# Altium PCB ESP32_CAN_V2.PcbDoc
Units mm, origin at the board's own origin, x right, y up, seen from the top; angles counter-clockwise.
Board outline 80 x 50 mm, 4 copper layers (Top Layer, Layer 1, Layer 2, Bottom Layer), stack 0.603 mm thick; 86 components, 94 nets, 361 pads, 29 vias.
Unrouted connection lines stored in the file: 147.
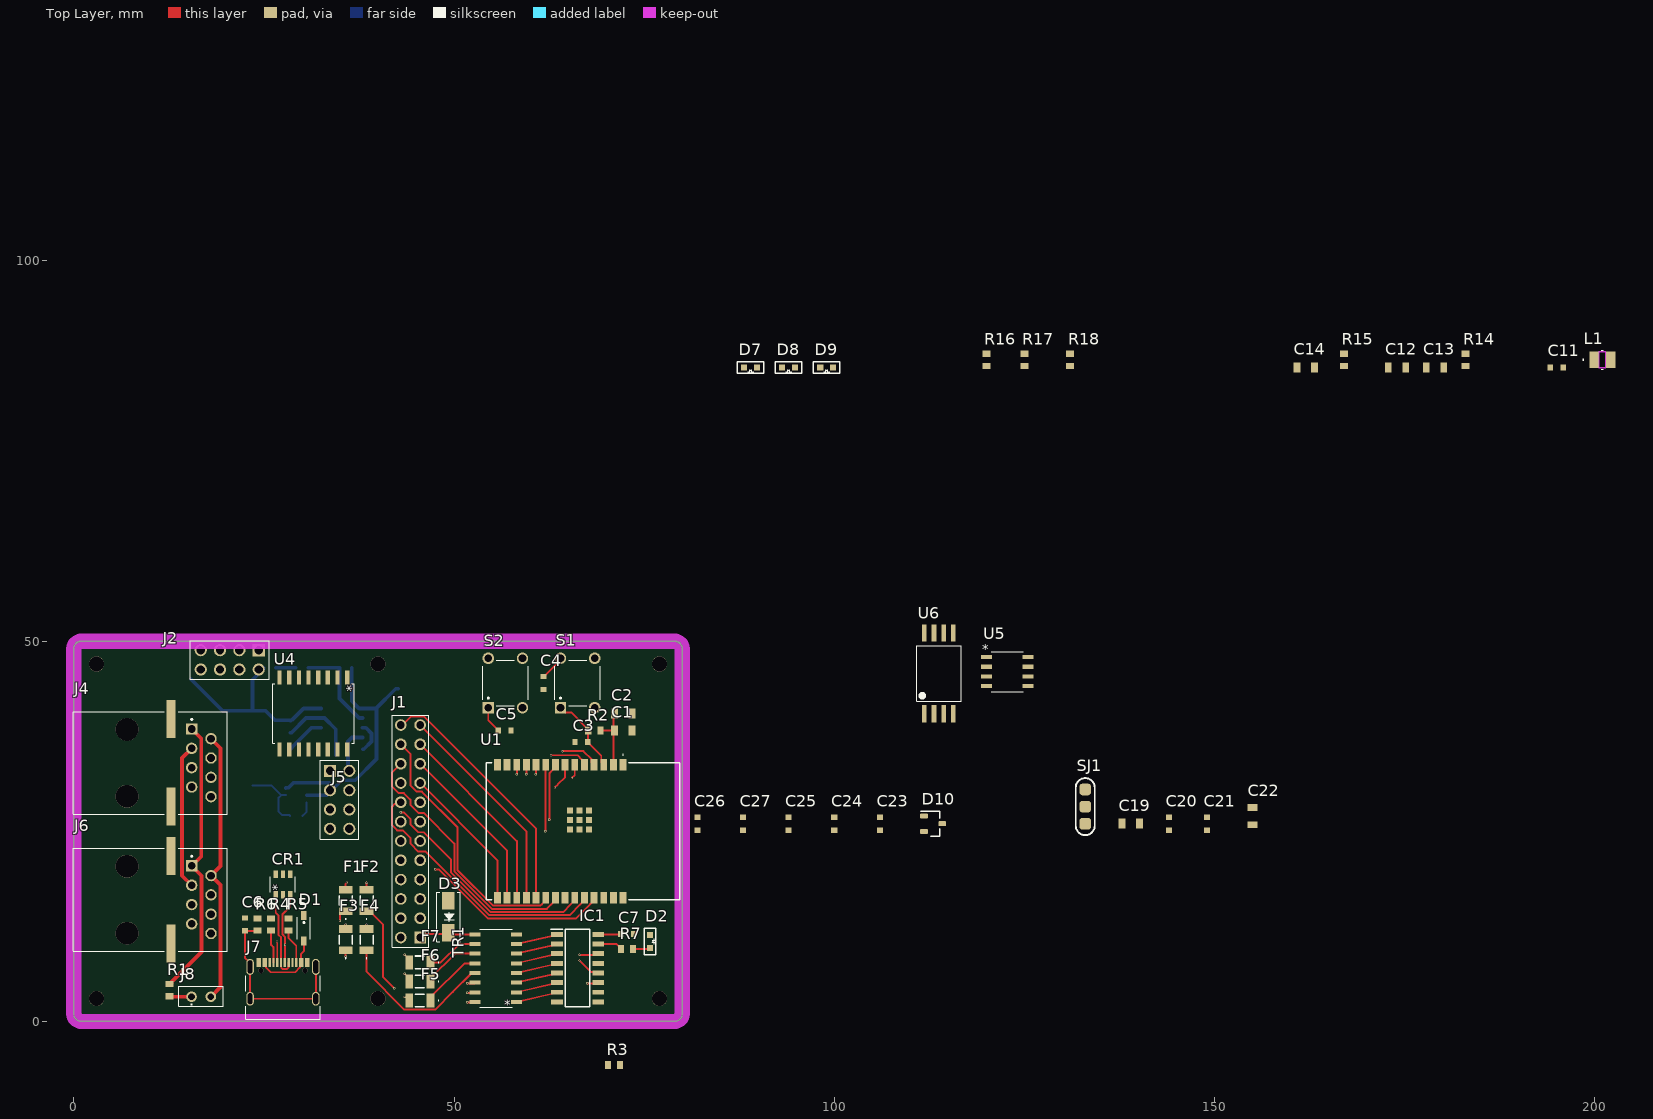
[diagram p0: Top Layer view]
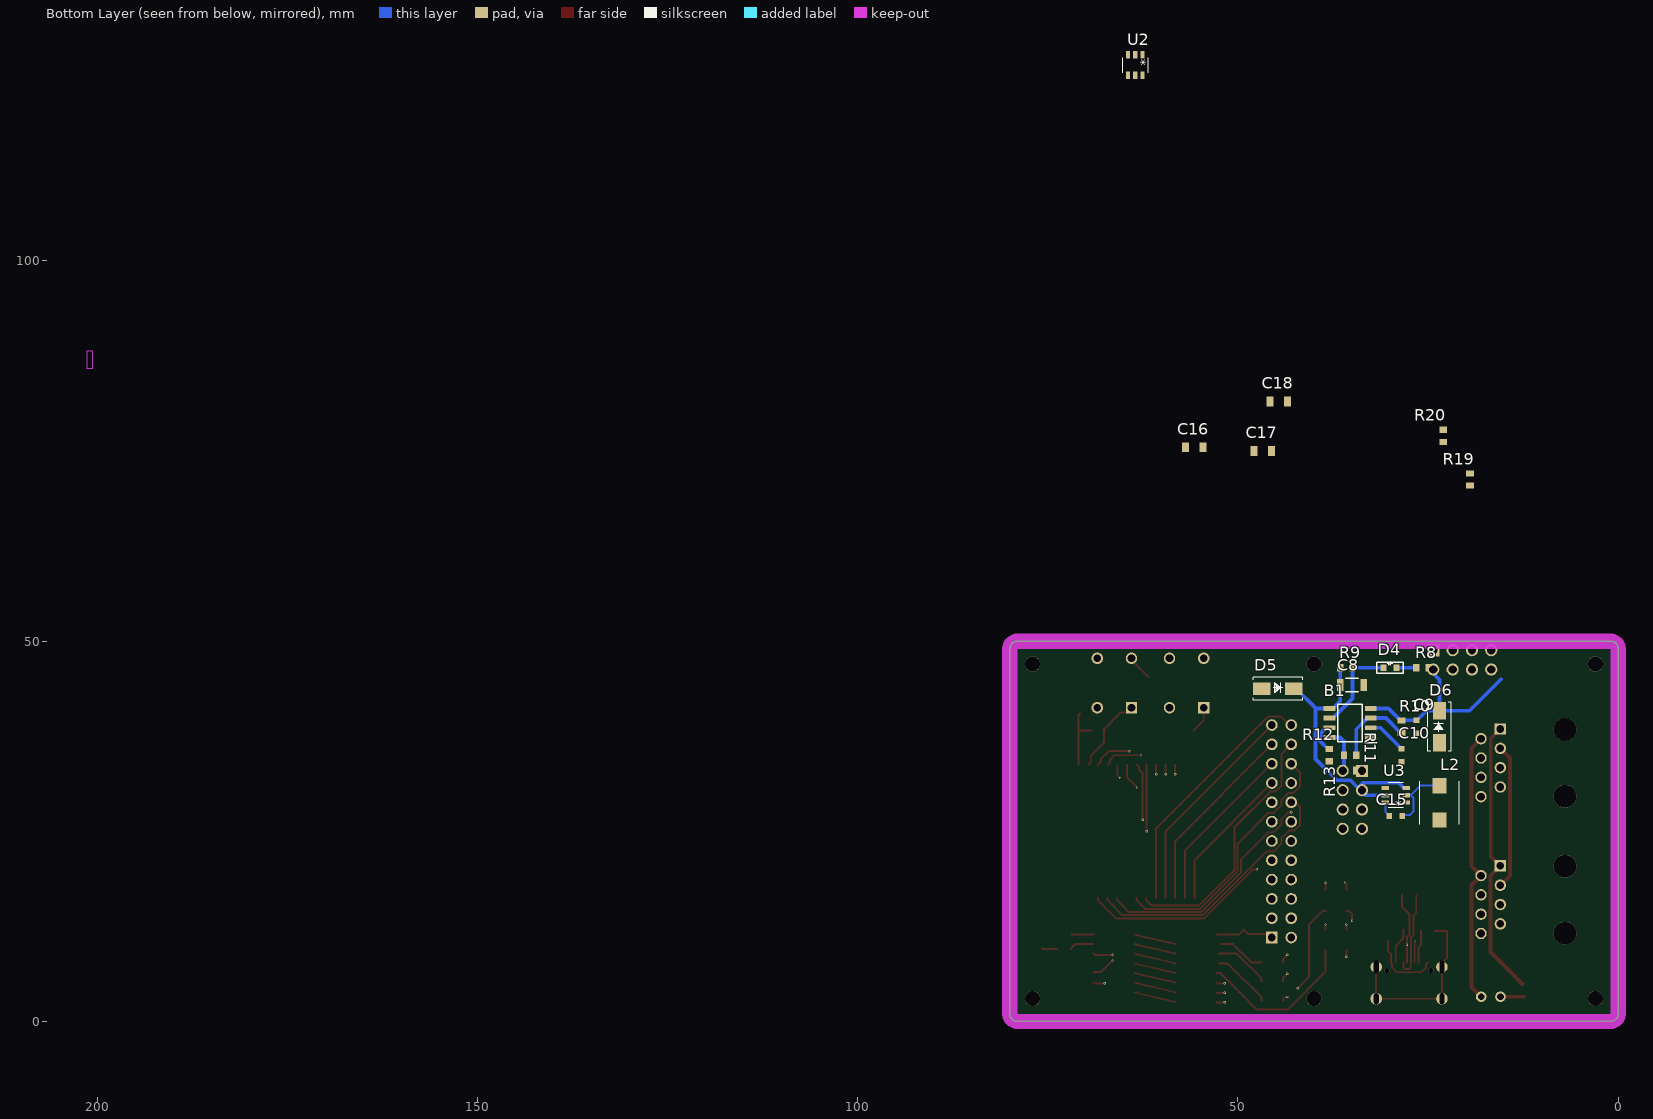
[diagram p1: Bottom Layer view, seen from below]
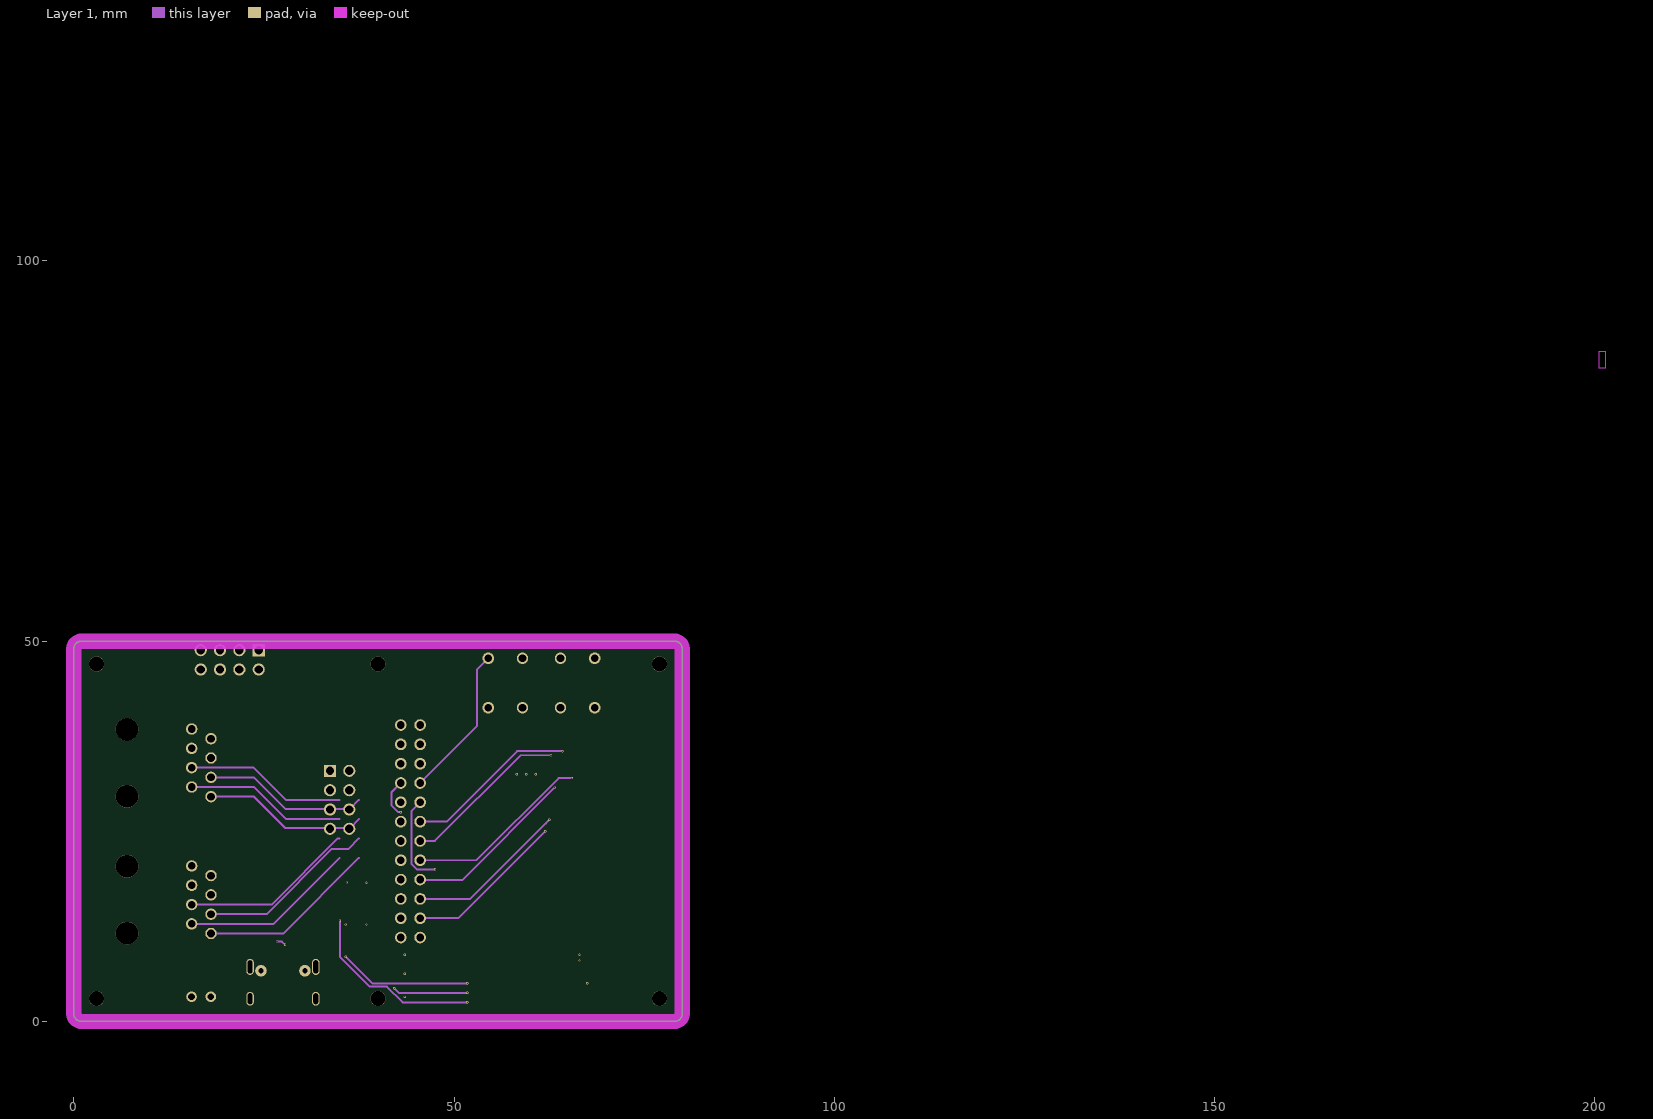
[diagram p2: Layer 1]
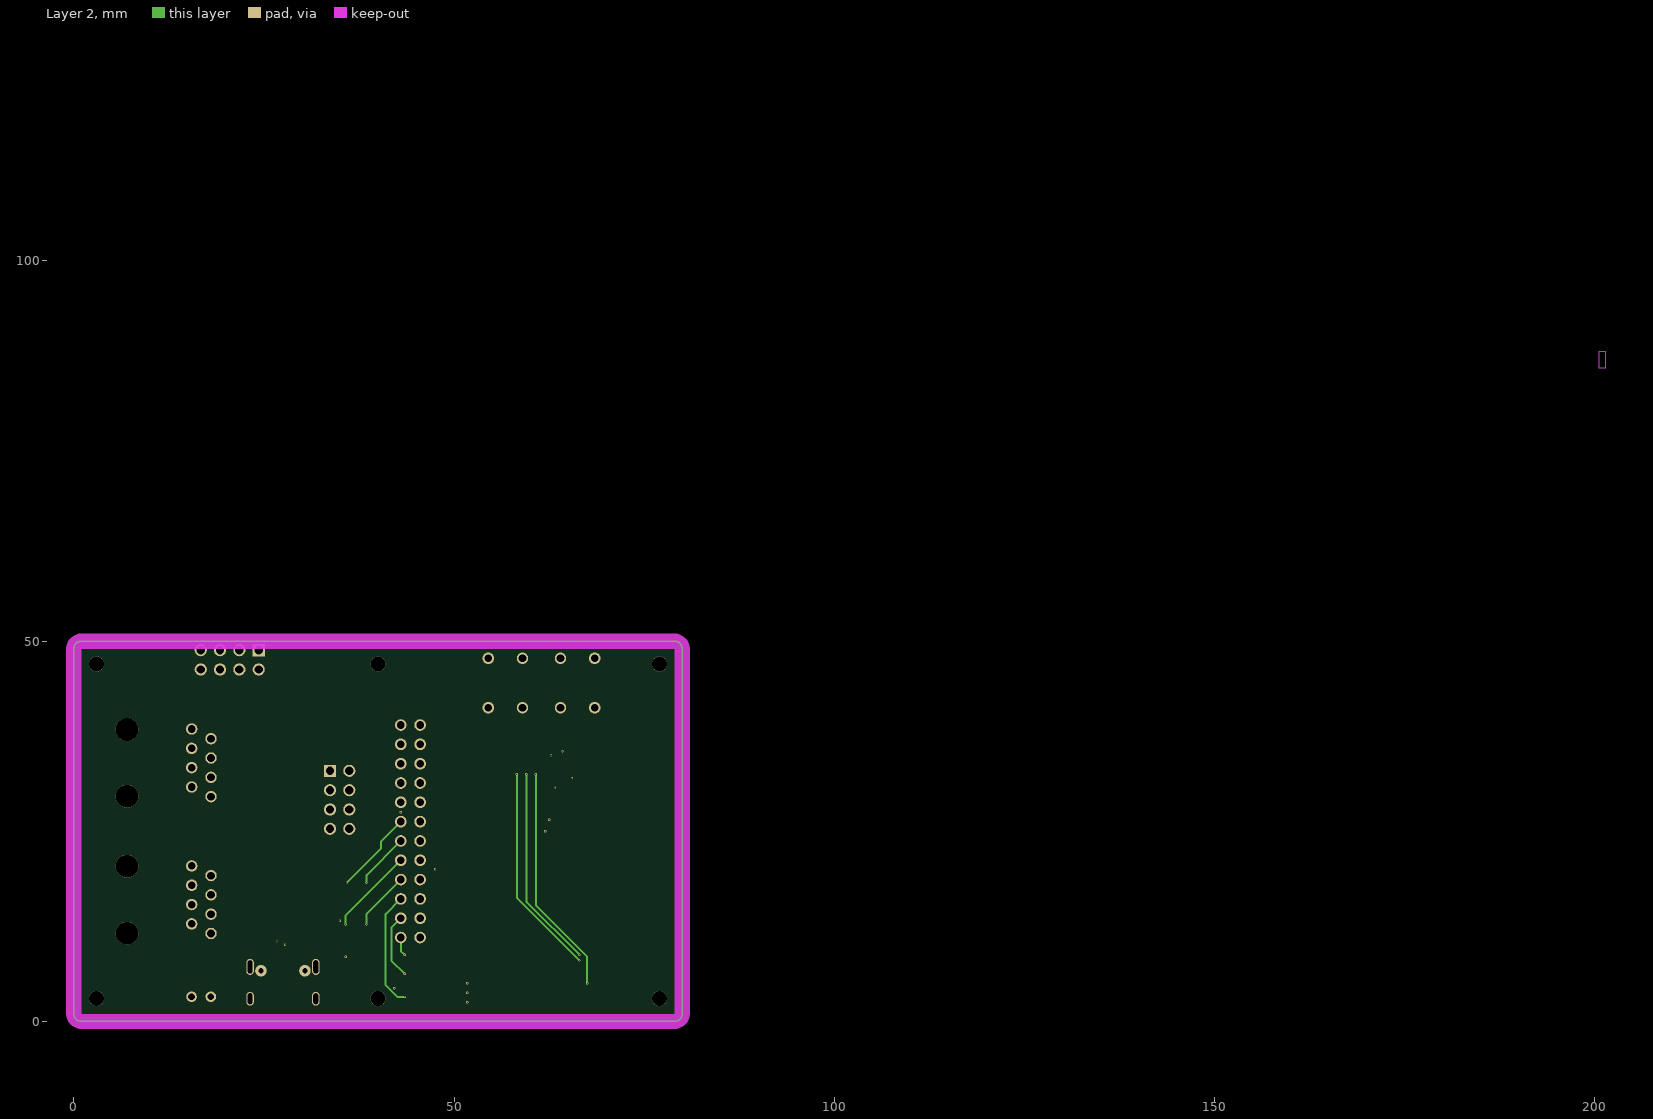
[diagram p3: Layer 2]

## Layer stack, top to bottom
Top Solder: solder mask 0.0102, Solder Resist, Dk 3.5
Top Layer: signal copper 0.0356
Dielectric 2: prepreg 0.0711, PP-006, Dk 4.1
Layer 1: signal copper 0.035
Dielectric 1: dielectric 0.32, FR-4, Dk 4.8
Layer 2: signal copper 0.035
Dielectric 3: prepreg 0.0711, PP-006, Dk 4.1
Bottom Layer: signal copper 0.0356
Bottom Solder: solder mask 0.0102, Solder Resist, Dk 3.5

## Board outline
0,1 0,49 cw(c1,49) 1,50 79,50 cw(c79,49) 80,49 80,1 cw(c79,1) 79,0 1,0 cw(c1,1)

## Design rules (kind name [scope] priority, off if disabled: settings)
Clearance [All] p1: gap=0.254 ignorepadtopadclearanceinfootprint=FALSE except(0.16: Track-Track Track-SMDPad SMDPad-SMDPad)
PolygonConnect [All] p1: connectstyle=Relief reliefconductorwidth=0.254 reliefentries=4 polygonreliefangle="90 Angle" airgapwidth=0.254
RoutingVias [All] p1: holewidth=0.2 width=0.3 viastyle="Through Hole" minholewidth=0.2 minwidth=0.3 maxholewidth=0.711 maxwidth=1.27
SolderMaskExpansion [All] p1: expansion=0 istentingtop=FALSE
SupplyNets "Schematic Supply Nets_7" [InNet('+3V3')] p1: voltage=0.000
SupplyNets "Schematic Supply Nets_6" [InNet('+5')] p2: voltage=0.000
SupplyNets "Schematic Supply Nets_5" [InNet('+5V')] p3: voltage=0.000
SupplyNets "Schematic Supply Nets_3" [InNet('+12V')] p4: voltage=0.000
SupplyNets "Schematic Supply Nets_2" [InNet('+12_fused')] p5: voltage=0.000
SupplyNets "Schematic Supply Nets_1" [InNet('+5V0')] p6: voltage=0.000
SupplyNets "Schematic Supply Nets" [InNet('GND')] p7: voltage=0.000
Width [All] p1: maxlimit=2 minlimit=0.254 preferedwidth=0.254 minimp=50.000000 maximp=50.000000 favimp=50.000000
30 further rules are at their usual default settings.

## Classes and differential pairs
net class OUT[6..0]: OUT0 OUT1 OUT2 OUT3 OUT4 OUT5 OUT6
net class GPIO[15..0]: GPIO0 GPIO1 GPIO2 GPIO3 GPIO4 GPIO5 GPIO6 GPIO7 GPIO8 GPIO9 GPIO10 GPIO11 GPIO12 GPIO13 GPIO14 GPIO15
component class U_ESP32_CAN_V2-usb: C6 CR1 D1 J7 R4 R5 R6
component class U_ESP32_CAN_V2-power: B1 C8 C9 C10 C11 C12 C13 C14 C15 C16 C17 C18 D4 D5 D6 D7 D8 D9 L1 L2 R8 R9 R10 R11 R12 R13 R14 R15 R16 R17 R18 R19 R20 U2 U3
component class U_ESP32_CAN_V2-out: C7 D2 D3 F1 F2 F3 F4 F5 F6 F7 IC1 R7 TR1
component class U_ESP32_CAN_V2-mcu: C1 C2 C3 C4 C5 R2 R3 S1 S2 U1
component class U_ESP32_CAN_V2-can: C19 C20 C21 C22 C23 C24 C25 C26 C27 D10 SJ1 U4 U5 U6
component class ESP32_CAN_V2-main: J1 J2 J4 J5 J6 J8 R1

## Components (designator, comment, footprint, x,y, rotation, side; value= is the part's Value field where it differs from the comment)
B1 "TPS25921ADR" SOIC127P600X175-8N 35.25,39.25 r0 bottom
C1 "10u" C0805 72.25,38.25 r180 top
C2 "10u" C0805 72.25,40.5 r180 top
C3 "1u" C0603 66.75,36.75 r0 top
C4 "0.1u" C0603 61.75,44.5 r90 top
C5 "0.1u" C0603 56.65,38.25 r180 top
C6 "1n" C0603 22.5,12.75 r270 top
C7 "100n" C0603 72.75,11.5 r0 top
C8 "100u" C1206 35,44.25 r0 bottom
C9 "0.1u" C0603 26.5,38.75 r90 bottom
C10 "2u" C0603 28.5,35 r90 bottom
C11 "100n" C0603 195,86 r0 top
C12 "22u" C0805 174,86 r0 top
C13 "22u" C0805 179,86 r0 top
C14 "10u" C0805 162,86 r0 top
C15 "0.1u" C0603 29.25,27 r0 bottom
C16 "2u2" C0805 55.75,75.5 r180 bottom
C17 "22u" C0805 46.75,75 r180 bottom
C18 "22u" C0805 44.65,81.5 r180 bottom
C19 "10u" C0805 139,26 r0 top
C20 "100n" C0603 144,26 r90 top
C21 "100n" C0603 149,26 r90 top
C22 "10u" C0805 155,27 r90 top
C23 "47p" C0603 106,26 r90 top
C24 "47p" C0603 100,26 r90 top
C25 "47p" C0603 94,26 r90 top
C26 "100n" C0603 82,26 r90 top
C27 "100n" C0603 88,26 r90 top
CR1 "USBLC6-2SC6" SOT23-6L_STM 27.5,18 r90 top
D1 "1N5819HW-7-F" SOD3715X145N 30.25,12.25 r270 top
D2 "LED" LED 75.75,10.5 r90 top
D3 "SMAJ30A" SMASERIES_LTF 49.25,13.75 r90 top
D4 "LED" LED 30,46.5 r0 bottom
D5 "SMAJ30A" SMASERIES_LTF 44.75,43.75 r0 bottom
D6 "SMAJ58CA" SMASERIES_LTF 23.5,38.75 r270 bottom
D7 "LED" LED 89,86 r0 top
D8 "LED" LED 94,86 r0 top
D9 "LED" LED 99,86 r0 top
D10 "NUP2105L" SOT-23 113,26 r0 top
F1 "PTC Fuse" PTSAHT120624V050 35.75,15.9 r90 top
F2 "PTC Fuse" PTSAHT120624V050 38.5,15.9 r90 top
F3 "PTC Fuse" PTSAHT120624V050 35.75,10.75 r90 top
F4 "PTC Fuse" PTSAHT120624V050 38.5,10.75 r90 top
F5 "PTC Fuse" PTSAHT120624V050 45.5,2.75 r180 top
F6 "PTC Fuse" PTSAHT120624V050 45.5,5.25 r180 top
F7 "PTC Fuse" PTSAHT120624V050 45.5,7.75 r180 top
IC1 "74HC595D" SOIC127P600X175-16N 66.25,7.006 r0 top
J1 "PinHeader_2x12" AMPHENOL_10129381-924003BLF 44.27,25 r90 top
J2 "Conn_2x4" CONN_10129381-X08002XLF_AMP 20.5,47.54 r180 top
J4 "RJE56" AMPHENOL_RJE561881410 7,34 r270 top
J5 "Conn_2x4" CONN_10129381-X08002XLF_AMP 34.96,29.135 r270 top
J6 "RJE56" AMPHENOL_RJE561881410 7,16 r270 top
J7 "USB4105-GF-A" USB4105_GCT 27.5,4.25 r0 top
J8 "Jumper_1x1" CON2_1X2_TU_TSW 16.75,3.25 r0 top
L1 "LCENA2520MKT2R2M0NK" IND_LCEN_2520MK_TAY 201,87 r0 top
L2 "AMPLA5030S-6R8MT" IND_AMPLA5030S-6R8MT 23.5,28.75 r270 bottom
R1 "120R" R0603 12.558,4.111 r270 top
R2 "10k" R0603 68.452,38.25 r0 top
R3 "3k3" R0603 71.048,-5.75 r180 top
R4 "5k1" R0603 25.948,12.75 r270 top
R5 "5k1" R0603 28.25,12.75 r270 top
R6 "100k" R0603 24.147,12.75 r270 top
R7 "120R" R0603 72.75,9.5 r0 top
R8 "1k" R0603 25.75,46.5 r180 bottom
R9 "100k" R0603 35.75,46.5 r0 bottom
R10 "470R" R0603 28.5,38.75 r90 bottom
R11 "64k9" R0603 35.25,35 r180 bottom
R12 "154k" R0603 38,35 r90 bottom
R13 "30k9" R0603 35.25,33 r0 bottom
R14 "31k6" R0603 183,87 r90 top
R15 "10k" R0603 167,87 r90 top
R16 "1k" R0603 120,87 r90 top
R17 "320R" R0603 125,87 r90 top
R18 "120R" R0603 131,87 r90 top
R19 "100k" R0603 19.5,71.25 r90 bottom
R20 "13k7" R0603 23,77 r90 bottom
S1 "TS02-66-70-BK-260-SCR-D" SW_TS02-66-70-BK-260-SCR-D 66.25,44.5 r90 top
S2 "TS02-66-70-BK-260-SCR-D" SW_TS02-66-70-BK-260-SCR-D 56.75,44.5 r90 top
SJ1 "Solderj Jumper" "SolderJumper 1x2" 133,26 r90 top
TR1 "ULN2003ADR" ULN2003ADR2G_OSI 55.5,7 r180 top
U1 "ESP32-C6-WROOM-1-N4" ESP32C6WROOM1N4 66.96,25 r270 top
U2 "AP62250WU-7" TSOT26STANDARD_DIO 63.5,125.75 r270 bottom
U3 "LMR51430YDDCR" SOT-23-THIN-6_DDC_TEX 29.25,29.75 r0 bottom
U4 "R05CTE05S-R" SMD_16_10.35X7.5X2.5_RCP 31.5,40.5 r270 top
U5 "TCAN1051HGDR" D8_TEX 122.75,46 r0 top
U6 "ISO6721FQDWVRQ1" DWV0008A-IPC_A 113.75,45.75 r90 top

## Footprints (in the part's own frame and the unit in brackets; to place one, negate y for a bottom-side part, rotate by r counter-clockwise, add the part's x,y. Pads: shape width x height; smd on the part's side, far side on the other; paste and mask are expansions set on the pad)
AMPHENOL_10129381-924003BLF [mm]
  rect 1.53x1.53 / inner round 1.53 / far side rect 1.53x1.53 hole 1.02: 01(-13.97,-1.27)
  round 1.53 hole 1.02: 02(-13.97,1.27) 03(-11.43,-1.27) 04(-11.43,1.27) 05(-8.89,-1.27) 06(-8.89,1.27) 07(-6.35,-1.27) 08(-6.35,1.27) 09(-3.81,-1.27) 10(-3.81,1.27) 11(-1.27,-1.27) 12(-1.27,1.27) 13(1.27,-1.27) 14(1.27,1.27) 15(3.81,-1.27) 16(3.81,1.27) 17(6.35,-1.27) 18(6.35,1.27) 19(8.89,-1.27) 20(8.89,1.27) 21(11.43,-1.27) 22(11.43,1.27) 23(13.97,-1.27) 24(13.97,1.27)
  silkscreen extent -15.24,-2.41 15.24,2.41, body extent -15.24,-2.41 15.24,2.41, height 10.42
AMPHENOL_RJE561881410 [mm]
  rect 1.5x1.5 / inner round 1.5 / far side rect 1.5x1.5 hole 1: 1(-4.445,8.5)
  round 1.5 hole 1: 2(-3.175,11.04) 3(-1.905,8.5) 4(-0.635,11.04) 5(0.635,8.5) 6(1.905,11.04) 7(3.175,8.5) 8(4.445,11.04)
  rect 5x1.2 smd paste-3: G1(-5.75,5.8) G2(5.75,5.8)
  round 3 hole 3 unplated: ""(-4.4,0) ""(4.4,0)
  silkscreen extent -6.75,-7.1 6.75,13.2, body extent -6.75,-7.1 6.75,13.2, height 14.61
C0603 [mm] "Ceramic Capacitors, 0603, body 1.6x0.8mm"
  rect 0.7x0.8 smd: 1(-0.85,0) 2(0.85,0)
  body extent -0.8,-0.4 0.8,0.4, height 0.8
C0805 [mm] "Ceramic Capacitors, body 2x1.25mm"
  rect 0.9x1.3 smd: 1(-1.15,0) 2(1.15,0)
  body extent -1,-0.63 1,0.63, height 0.8
C1206 [mm] "Ceramic Capacitors, body 3.2x1.6mm"
  rect 0.9x1.6 smd: 1(-1.55,0) 2(1.55,0)
  silkscreen extent -0.8,-0.87 0.8,0.87, body extent -1.6,-0.8 1.6,0.8, height 0.95
CON2_1X2_TU_TSW [mil]
  round 55 hole 35 paste-99999 mask+0: 1(-50,0) 2(50,0)
  silkscreen extent -115,-50 115,55, body extent -100,-50 100,50, height 500
CONN_10129381-X08002XLF_AMP [mil]
  rect 63x63 hole 43 paste-99999 mask+0: 1(-150,-50)
  round 63 hole 43 paste-99999 mask+0: 2(-150,50) 3(-50,-50) 4(-50,50) 5(50,-50) 6(50,50) 7(150,-50) 8(150,50)
  silkscreen extent -205,-100 205,100, body extent -200,-100 200,100, height 338
D8_TEX [mm]
  rect 1.455x0.558 smd paste+0 mask+0: 1(-2.721,1.905) 2(-2.721,0.635) 3(-2.721,-0.635) 4(-2.721,-1.905) 5(2.721,-1.905) 6(2.721,-0.635) 7(2.721,0.635) 8(2.721,1.905)
  silkscreen extent -2.12,-2.63 2.12,2.63, body extent -3.1,-2.5 3.1,2.5, height 1.76
DWV0008A-IPC_A [mm]
  rect 2.254x0.622 smd paste+0 mask+0: 1(-5.301,1.905) 2(-5.301,0.635) 3(-5.301,-0.635) 4(-5.301,-1.905) 5(5.301,-1.905) 6(5.301,-0.635) 7(5.301,0.635) 8(5.301,1.905)
  silkscreen extent -3.67,-2.93 3.67,2.93
ESP32C6WROOM1N4 [mm]
  rect 1.5x0.9 smd: 1(-8.75,5.26) 2(-8.75,3.99) 3(-8.75,2.72) 4(-8.75,1.45) 5(-8.75,0.18) 6(-8.75,-1.09) 7(-8.75,-2.36) 8(-8.75,-3.63) 9(-8.75,-4.9) 10(-8.75,-6.17) 11(-8.75,-7.44) 12(-8.75,-8.71) 13(-8.75,-9.98) 14(-8.75,-11.25) 15(8.75,-11.25) 16(8.75,-9.98) 17(8.75,-8.71) 18(8.75,-7.44) 19(8.75,-6.17) 20(8.75,-4.9) 21(8.75,-3.63) 22(8.75,-2.36) 23(8.75,-1.09) 24(8.75,0.18) 25(8.75,1.45) 26(8.75,2.72) 27(8.75,3.99) 28(8.75,5.26)
  rect 0.8x0.8 smd: 29(-1.505,-0.46) 30(-1.505,0.79) 31(-2.755,0.79) 32(-2.755,-0.46) 33(-2.755,-1.71) 34(-1.505,-1.71) 35(-0.255,-1.71) 36(-0.255,-0.46) 37(-0.255,0.79)
  silkscreen extent -10.1,-12.75 9,12.75, body extent -9.01,-12.8 9.01,12.7, height 3.1
IND_AMPLA5030S-6R8MT [mm]
  rect 2x1.8 smd: 1(-2.25,0) 2(2.25,0)
  silkscreen extent -2.85,-2.6 2.85,2.6, body extent -2.92,-2.6 2.92,2.6, height 2.8
IND_LCEN_2520MK_TAY [mil]
  rect 48.78x87 smd paste+0 mask+0: 1(-42.39,0) 2(42.39,0)
  Top Layer keep-out region: -16,-41.5 -16,41.5 16,41.5 16,-41.5
  Keep-Out Layer region: -16,-43.5 -16,43.5 16,43.5 16,-43.5
  silkscreen extent -103,-48 6,48, body extent -53,-44 53,44, height 47
LED [mm]
  rect 0.8x0.8 smd: 1(-0.85,0) 2(0.85,0)
  silkscreen extent -1.75,-0.8 1.75,0.75, body extent -0.8,-0.4 0.8,0.4, height 0.95
PTSAHT120624V050 [mm]
  rect 1x1.8 smd: 1(-1.4,0) 2(1.4,0)
  silkscreen extent -2.5,-0.85 0.6,0.85, body extent -1.62,-0.85 1.68,0.85, height 1.06
R0603 [mm]
  rect 0.808x1.041 smd paste+0 mask+0: 1(-0.798,0) 2(0.798,0)
  body extent -0.9,-0.5 0.9,0.5, height 0.56
SMASERIES_LTF [mm]
  rect 2.3x1.651 smd paste+0 mask+0: 1(-2.1,0) 2(2.1,0)
  silkscreen extent -3.25,-1.54 3.25,1.52, body extent -2.64,-1.4 2.64,1.4, height 2.34
SMD_16_10.35X7.5X2.5_RCP [mm]
  rect 1.849x0.558 smd paste+0 mask+0: 1(-4.722,4.445) 2(-4.722,3.175) 3(-4.722,1.905) 4(-4.722,0.635) 5(-4.722,-0.635) 6(-4.722,-1.905) 7(-4.722,-3.175) 8(-4.722,-4.445) 9(4.722,-4.445) 10(4.722,-3.175) 11(4.722,-1.905) 12(4.722,-0.635) 13(4.722,0.635) 14(4.722,1.905) 15(4.722,3.175) 16(4.722,4.445)
  silkscreen extent -3.92,-5.35 3.92,5.35, body extent -5.3,-5.22 5.3,5.22, height 2.64
SOD3715X145N [mm]
  rect 1.21x0.73 smd: A(1.68,0) C(-1.68,0)
  silkscreen extent -1.43,-0.85 1.43,0.85, body extent -1.83,-0.77 1.83,0.77, height 1.51
SOIC127P600X175-8N [mm]
  rect 1.528x0.65 smd: 1(-2.711,1.905) 2(-2.711,0.635) 3(-2.711,-0.635) 4(-2.711,-1.905) 5(2.711,-1.905) 6(2.711,-0.635) 7(2.711,0.635) 8(2.711,1.905)
  silkscreen extent -3.47,-2.45 1.6,2.58, body extent -3.01,-2.45 3.01,2.45, height 1.63
SOIC127P600X175-16N [mm]
  rect 1.55x0.65 smd: 1(-2.725,4.445) 2(-2.725,3.175) 3(-2.725,1.905) 4(-2.725,0.635) 5(-2.725,-0.635) 6(-2.725,-1.905) 7(-2.725,-3.175) 8(-2.725,-4.445) 9(2.725,-4.445) 10(2.725,-3.175) 11(2.725,-1.905) 12(2.725,-0.635) 13(2.725,0.635) 14(2.725,1.905) 15(2.725,3.175) 16(2.725,4.445)
  silkscreen extent -3.5,-5.1 1.6,5.12, body extent -3,-5.1 3,5.1, height 1.56
"SolderJumper 1x2" [mil]
  rrect50% 60x60 smd: 1(88.58,0) 2(0,0) 3(177.17,0)
  silkscreen extent -59,-49 236,49
SOT23-6L_STM [mil]
  rect 38.5x22 smd paste+0 mask+0: 1(-53.75,37.4) 2(-53.75,0) 3(-53.75,-37.4) 4(53.75,-37.4) 5(53.75,0) 6(53.75,37.4)
  silkscreen extent -40,-65 40,65, body extent -59,-60 59,60, height 57
SOT-23 [mm] "SOT23, 3-Leads, IPC Medium Density, TO-236"
  rrect25% 1x0.65 smd: 1(-1.2,1.02) 2(-1.2,-1.02) 3(1.2,0)
  silkscreen extent -1.65,-1.65 0.85,1.65, body extent -1.3,-1.52 1.3,1.52, height 1.3
SOT-23-THIN-6_DDC_TEX [mm]
  rect 0.998x0.558 smd paste+0 mask+0: 1(-1.375,0.95) 2(-1.375,0) 3(-1.375,-0.95) 4(1.375,-0.95) 5(1.375,0) 6(1.375,0.95)
  silkscreen extent -1,-1.65 1,1.65, body extent -1.52,-1.52 1.52,1.52, height 1.09
SW_TS02-66-70-BK-260-SCR-D [mm]
  rect 1.508x1.508 / inner round 1.508 / far side rect 1.508x1.508 hole 1 mask+0.102: 1(-3.25,2.25)
  round 1.508 hole 1 mask+0.102: 2(3.25,2.25) 3(-3.25,-2.25) 4(3.25,-2.25)
  silkscreen extent -3,-3 3,3, body extent -3.6,-3 3.6,3, height 7
TSOT26STANDARD_DIO [mm]
  rect 0.998x0.558 smd paste+0 mask+0: 1(-1.35,0.95) 2(-1.35,0) 3(-1.35,-0.95) 4(1.35,-0.95) 5(1.35,0) 6(1.35,0.95)
  silkscreen extent -0.98,-1.68 0.98,1.68, body extent -1.5,-1.55 1.5,1.55, height 0.99
ULN2003ADR2G_OSI [mm]
  rect 1.455x0.533 smd paste+0 mask+0: 1(-2.721,4.445) 2(-2.721,3.175) 3(-2.721,1.905) 4(-2.721,0.635) 5(-2.721,-0.635) 6(-2.721,-1.905) 7(-2.721,-3.175) 8(-2.721,-4.445) 9(2.721,-4.445) 10(2.721,-3.175) 11(2.721,-1.905) 12(2.721,-0.635) 13(2.721,0.635) 14(2.721,1.905) 15(2.721,3.175) 16(2.721,4.445)
  silkscreen extent -2.12,-5.12 2.12,5.12, body extent -3.1,-4.99 3.1,4.99, height 1.73
USB4105_GCT [mil]
  round 26 / inner round 60 / far side round 26 hole 26 unplated paste-99999 mask+0: 17(-113.78,94.91) 18(113.78,94.91)
  rect 23x45 smd paste-22.5 mask-22.5: A1-B12(-125.98,137.24) A4-B9(-94.49,137.24) B1-A12(125.98,137.24) B4-A9(94.49,137.24)
  rect 12x45 smd paste+0 mask+0: A5(-49.21,137.24) A6(-9.84,137.24) A7(9.84,137.24) A8(49.21,137.24) B5(68.9,137.24) B6(29.53,137.24) B7(-29.53,137.24) B8(-68.9,137.24)
  oval 39x71 / inner oval 39x71 / far side round 60 hole 55 slot 24 at 0 deg paste-99999 mask-35.5: SHELL(-170.08,-49.97) SHELL(170.08,-49.97)
  oval 39x83 / inner oval 39x83 / far side round 60 hole 67 slot 24 at 0 deg paste-99999 mask-41.5: SHELL(-170.08,114.6) SHELL(170.08,114.6)
  silkscreen extent -194,-157 194,70, body extent -177,-152 175,152, height 130

## Part data
B1: "18V, 1.6A, 90m eFuse with Adjustable +/-2% Accurate Current Limit", Manufacturer_Name="Texas Instruments", Mouser Part Number=595-TPS25921ADR, Datasheet Link=http://www.ti.com/lit/gpn/tps25921a, Geometry.Height=1.75mm, Manufacturer_Part_Number=TPS25921ADR, Mouser Price/Stock=https://www.mouser.co.uk/ProductDetail/Texas-Instruments/TPS25921ADR?qs=m%2F7bTylgptfvwfVPRm0ALQ%3D%3D
C1 C2 C3 C4 C5 C6 C7 C8 C9 C10 C11 C12 C13 C14 C15 C16 C17 C18 C19 C20 C21 C22 C23 C24 C25 C26 C27: library part C
CR1: "ESD Protection for USB 2.0 High Speed", Manufacturer_Name=STMicroelectronics, Copyright="Copyright (C) 2025 Ultra Librarian. All rights reserved.", Manufacturer_Part_Number=USBLC6-2SC6, RefDes=RefDes, Type=Type
D1: "Diode Schottky 40 V 1A Surface Mount SOD-123", Package="SOD-123 Fairchild Semiconductor", Availability="In Stock", Check_prices=https://www.snapeda.com/parts/1N5819HW-7-F/Diodes+Inc./view-part/?ref=eda, MF="Diodes Inc.", MP=1N5819HW-7-F, Price=None, Purchase-URL=https://pricing.snapeda.com/search/part/1N5819HW-7-F/?ref=eda, SnapEDA_Link=https://www.snapeda.com/parts/1N5819HW-7-F/Diodes+Inc./view-part/?ref=snap
D3 D5 D6: "No Description Available", Manufacturer_Name="Littelfuse Inc", Copyright="Copyright (C) 2026 Ultra Librarian. All rights reserved."
  D3 D5: Manufacturer_Part_Number=SMAJ30A
  D6: Manufacturer_Part_Number=SMAJ58CA
D10: library part TVS-Bidirectional-Diode_Dual, ki_description="TVS Dual Diode", ki_keywords="TVS Dual Diode"
F1 F2 F3 F4 F5 F6 F7: "PTSAHT1206"
IC1: "Shift Register Single 8-Bit Serial to Serial/Parallel 16-Pin SOIC T/R", Manufacturer_Name=Toshiba, Mouser Part Number=757-74HC595D, Datasheet Link=https://toshiba.semicon-storage.com/info/docget.jsp?did=36768&prodName=74HC595D, Geometry.Height=1.75mm, Manufacturer_Part_Number=74HC595D, Mouser Price/Stock=https://www.mouser.co.uk/ProductDetail/Toshiba/74HC595D?qs=7EBvPakHacViJoQmXKcnew%3D%3D
J1: Package=None, Availability=Unavailable, MF="{'manufacturer': u'Amphenol ICC (FCI)'}", MP=10129381-924003BLF, Price=None
J2 J5: library part PinHeader_2x4, Manufacturer_Name="Amphenol ICC", Manufacturer_Part_Number=10129381-908002BLF, Copyright="Copyright (C) 2026 Ultra Librarian. All rights reserved.", RefDes=RefDes, Type=Type
J4 J6: library part RJE561881410, "Modular Jack - Right Angle, Input Output Connectors 8P8C, Without Shield .", Package=None, Check_prices=https://www.snapeda.com/parts/RJE561881410/Amphenol/view-part/?ref=eda, MF="Amphenol Commercial Products", MP=RJE561881410, Reference=RJE56-188-1410, SnapEDA_Link=https://www.snapeda.com/parts/RJE561881410/Amphenol/view-part/?ref=snap, Supplier=Farnell, Type=RJE56
J7: "Description", Manufacturer_Name="Global Connector Technology", Copyright="Copyright (C) 2025 Ultra Librarian. All rights reserved.", Manufacturer_Part_Number=USB4105-GF-A, RefDes=RefDes, Type=Type
J8: library part TSW-102-08-T-S, "No Description Available", Manufacturer_Name="Samtec Inc", Copyright="Copyright (C) 2026 Ultra Librarian. All rights reserved.", Manufacturer_Part_Number=TSW-102-08-T-S, RefDes=RefDes, Type=Type
L1: library part L, "No Description Available", Manufacturer_Name="TAIYO YUDEN", Copyright="Copyright (C) 2026 Ultra Librarian. All rights reserved.", Manufacturer_Part_Number=LCENA2520MKT2R2M0NK
L2: "Inductor Power Shielded/Molded Wirewound 6.8uH 20% 100KHz Carbonyl Powder 4A 0.0762Ohm DCR 2220 T/R", Package=Package, Availability=Unavailable, Check_prices=https://www.snapeda.com/parts/AMPLA5030S-6R8MT/Abracon+LLC/view-part/?ref=eda, MF="Abracon LLC", MP=AMPLA5030S-6R8MT, Price=None, SnapEDA_Link=https://www.snapeda.com/parts/AMPLA5030S-6R8MT/Abracon+LLC/view-part/?ref=snap
R1 R2 R3 R4 R5 R6 R7 R8 R9 R10 R11 R12 R13 R14 R15 R16 R17 R18 R19 R20: library part R
S1 S2: "6 x 6 mm, 7 mm Actuator Height, 260 gf, Black, Short Crimped, Through Hole, SPST, Tactile Switch", Package=None, Check_prices=https://www.snapeda.com/parts/TS02-66-70-BK-260-SCR-D/Same+Sky/view-part/?ref=eda, MF="Same Sky", MP=TS02-66-70-BK-260-SCR-D, SnapEDA_Link=https://www.snapeda.com/parts/TS02-66-70-BK-260-SCR-D/Same+Sky/view-part/?ref=snap
SJ1: library part "Solder Jumper 1x2"
TR1: library part ULN2003ADR2G, "No Description Available", Manufacturer_Name=onsemi, Copyright="Copyright (C) 2026 Ultra Librarian. All rights reserved.", Manufacturer_Part_Number=ULN2003ADR2G, RefDes=RefDes, Type=Type
U1: library part ESP32-C6-WROOM-1-N4_reorder, "802.15.4, Bluetooth, WiFi Bluetooth v5.0, Zigbee Transceiver Module 2.4GHz PCB Trace Surface Mount", Manufacturer_Name="Espressif Systems", Mouser Part Number=356-ESP32C6WROOM1N4, Datasheet Link=https://www.espressif.com/sites/default/files/documentation/esp32-c6-wroom-1_wroom-1u_datasheet_en.pdf, Geometry.Height=3.25mm, Manufacturer_Part_Number=ESP32-C6-WROOM-1-N4, Mouser Price/Stock=https://www.mouser.co.uk/ProductDetail/Espressif-Systems/ESP32-C6-WROOM-1-N4?qs=8Wlm6%252BaMh8R1JRAtXlt87w%3D%3D
U2: "No Description Available", Manufacturer_Name="Diodes Inc", Copyright="Copyright (C) 2026 Ultra Librarian. All rights reserved.", Manufacturer_Part_Number=AP62250WU-7, RefDes=RefDes, Type=Type
U3: "SIMPLE SWITCHER&reg; 4.5-V to 36-V, 3-A synchronous buck converter with 40-&micro;A IQ 6-SOT-23-THIN -40 to 150", Manufacturer_Name="Texas Instruments", Copyright="Copyright (C) 2025 Ultra Librarian. All rights reserved.", Manufacturer_Part_Number=LMR51430YDDCR, RefDes=RefDes, Type=Type
U4: "DC/DC converter", Manufacturer_Name="Recom Power", Copyright="Copyright (C) 2026 Ultra Librarian. All rights reserved.", Manufacturer_Part_Number=R05CTE05S-R, RefDes=RefDes, Type=Type
U5: "Fault Protected CAN Transceiver With Flexible Data-Rate 8-SOIC -55 to 125", Manufacturer_Name="Texas Instruments", Copyright="Copyright (C) 2026 Ultra Librarian. All rights reserved.", Datasheet=https://www.ti.com/lit/gpn/tcan1051hg, Manufacturer_Part_Number=TCAN1051HGDR, RefDes=RefDes, Type=Type
U6: "Automotive, general-purpose, dual-channel, 1/1 digital isolator 8-SOIC -40 to 125", Manufacturer_Name="Texas Instruments", Copyright="Copyright (C) 2026 Ultra Librarian. All rights reserved.", Datasheet=https://www.ti.com/lit/gpn/iso6721-q1, Manufacturer_Part_Number=ISO6721FQDWVRQ1, RefDes=RefDes, Type=TYPE

## Free pads (board coordinates)
  round 2 hole 2 unplated: 5(3,3) 5(3,47) 5(77,3) 5(77,47) 6(40,3) 6(40,47)

## Via types
v1: diameter 0.3, hole 0.2, Top Layer to Bottom Layer, 29 vias

## Nets (pads, with @x,y where several pads share a name; then routed paths per layer and width w, separated by ;. In a path a pad name is that pad's centre, name@x,y a point inside that pad or via, vN(x,y) a via of type N, cw(c..) or ccw(c..) an arc to the next point about the centre after c; other vN are vias at no path point)
5V0_CAN_6: C21.2 C22.2 C27.2 SJ1.2 U4.13 U4.14 U5.3 U6.8
+3V3: C1.2 C2.2 C7.1 C12.2 C13.2 C26.2 IC1.10 IC1.16 J2.1 J2.2 R2.2 R3.2 R14.2 R18.2 U1.2 U6.1 | length 11.5
  Top Layer w0.254: IC1.16 71.851,11.451 C7.1 ; R2.2 C1.2@70.95,38.25 ; C2.2@70.78,40.5 70.95,40.33 C1.2@70.95,38.25 ; U1.2 C1.2@70.95,38.25
+5: C14.2 C17.2 C18.2 L2.2 R17.2 R19.2 U2.3
+5V: CR1.5 D1.C J2.3 J2.4
+5V0: C19.2 C20.2 U4.3 U4.4
+12_fused: B1.5 C8.2 C16.2 D5.1 R9.2 U3.3 U3.5 | length 36.7
  Bottom Layer w0.5: U3.3 27.904,30.729 28.229,30.729 28.889,31.389 33.577,31.389 34.239,30.727 ; U3.5 33.262,29.75 34.239,30.727 ; R9.2 36.549,46.499 36.549,44.251 C8.2 36.55,42.127 37.522,41.155 B1.5 39.73,41.155 ; D5.1 42.325,43.75 39.73,41.155 ; 34.239,30.727 35.216,31.704 37.006,31.704 39.795,34.493 39.795,41.09 39.73,41.155
+12V: B1.4 C9.2 D6.1 J2.5 J2.6 R8.2 R10.2 R16.2 | length 26
  Bottom Layer w0.5: 15.42,45 19.57,40.85 D6.1 ; R8.2 24.952,46.384 23.5,44.931 D6.1 ; R10.2 28.448,39.6 C9.2 26.45,39.6 25.2,40.85 D6.1 ; R10.2@28.77,39.702 30.224,41.155 B1.4
CAN_GND: C21.1 C22.1 C23.1 C25.2 C27.1 D10.3 J4.3 J6.3 SJ1.3 U4.9 U4.10 U4.12 U4.15 U4.16 U5.2 U6.5 | length 19
  Top Layer w0.5: J6.3 14.246,19.159 14.246,34.651 J4.3
CAN_RX_6: U5.4 U6.7
CAN_TX_6: U5.1 U6.6
GND: B1.1 C1.1 C2.1 C3.1 C4.1 C5.1 C6.1 C7.2 C8.1 C9.1 C10.1 C12.1 C13.1 C14.1 C16.1 C17.1 C18.1 C19.1 C20.1 C26.1 CR1.2 D2.2 D3.2 D5.2 D6.2 D7.2 D8.2 D9.2 IC1.8 IC1.13 J2.7 J2.8 J4.G1 J4.G2 J6.G1 J6.G2 J7.A1-B12 J7.B1-A12 R4.1 R5.1 R6.1 R12.1 R13.1 R15.1 R20.1 S1.4 TR1.8 U1.1 U1.28 U1.29 U1.30 U1.31 U1.32 U1.33 U1.34 U1.35 U1.36 U1.37 U2.1 U3.1 U4.1 U4.2 U4.5 U4.6 U4.7 U4.8 U6.4
GPIO0: J1.03 U1.9 | length 30
  Top Layer w0.254: v1(62,25) 62,33.69 U1.9
  Layer 1 w0.254: J1.03 50.57,13.57 v1(62,25)
GPIO1: J1.05 U1.8 | length 28.9
  Top Layer w0.254: v1(62.531,26.5) 62.531,32.598 63.007,33.074 63.007,33.427 U1.8
  Layer 1 w0.254: J1.05 52.11,16.11 62.05,26.05 62.081,26.05 v1(62.531,26.5)
GPIO2: J1.07 U1.7 | length 26.3
  Top Layer w0.254: v1(63.265,30.764) 63.265,30.777 63.633,31.145 63.633,31.159 64.6,32.126 U1.7
  Layer 1 w0.254: J1.07 45.61,18.58 51.074,18.58 63.258,30.764 v1(63.265,30.764)
GPIO3: J1.09 U1.6 | length 26.3
  Top Layer w0.254: v1(65.5,32) 65.5,32.011 65.87,32.381 U1.6
  Layer 1 w0.254: J1.09 52.94,21.19 63.75,32 v1(65.5,32)
GPIO4: J1.11 U1.5 | length 27
  Top Layer w0.254: v1(62.75,35) 66.25,35 66.817,34.433 66.817,34.073 U1.5
  Layer 1 w0.254: J1.11 47.495,23.73 58.765,35 v1(62.75,35)
GPIO5: J1.13 U1.4 | length 27.7
  Top Layer w0.254: v1(64.25,35.531) 67.009,35.531 68.087,34.453 68.087,34.073 U1.4
  Layer 1 w0.254: J1.13 49.02,26.27 58.281,35.531 v1(64.25,35.531)
GPIO6: J1.15 U1.25 | length 36.9
  Top Layer w0.254: v1(47.5,20) 48,20 54.443,13.557 66.053,13.557 67.888,15.393 67.888,15.428 68.41,15.95 U1.25
  Layer 1 w0.254: J1.15 44.394,27.664 44.394,20.715 45.109,20 v1(47.5,20)
GPIO7: J1.17 S2.2 U1.15 | length 39.4
  Top Layer w0.254: J1.17 55.71,21.18 U1.15
  Layer 1 w0.254: J1.17 53,38.81 53,46.25 S2.2
GPIO8: J1.19 U1.16 | length 22.4
  Top Layer w0.254: J1.19 56.98,22.45 U1.16
GPIO9: J1.21 U1.17 | length 25.4
  Top Layer w0.254: J1.21 58.25,23.72 U1.17
GPIO10: J1.23 U1.18 | length 28.5
  Top Layer w0.254: J1.23 59.52,24.99 U1.18
GPIO11: J1.24 U1.19 | length 33.5
  Top Layer w0.254: J1.24 43.22,38.97 44.366,40.116 46.015,40.116 60.79,25.341 U1.19
GPIO12: J1.22 U1.20 | length 34.2
  Top Layer w0.254: J1.22 44.279,35.151 44.279,30.991 45.065,30.204 45.767,30.204 50.454,25.517 50.454,19.9 55.141,15.213 61.359,15.213 61.538,15.393 61.538,15.428 62.06,15.95 U1.20
GPIO13: J1.20 U1.21 | length 35
  Top Layer w0.254: J1.20 41.854,32.744 41.854,30.875 42.711,30.018 43.413,30.018 44.27,29.161 44.27,28.459 45.313,27.416 46.015,27.416 50.04,23.391 50.04,19.729 54.97,14.799 62.215,14.799 62.808,15.393 62.808,15.428 63.33,15.95 U1.21
GPIO14: J1.18 U1.23 | length 35.8
  Top Layer w0.254: v1(43,27.5) 43.009,27.491 43.399,27.491 44.246,26.645 44.246,25.944 45.313,24.876 46.015,24.876 49.626,21.265 49.626,19.557 54.798,14.385 64.341,14.385 65.348,15.393 65.348,15.428 65.87,15.95 U1.23
  Layer 1 w0.254: v1(43,27.5) 42.991,27.509 42.681,27.509 41.75,28.439 41.75,30.1 J1.18
GPIO15: J1.16 U1.24 | length 35.8
  Top Layer w0.254: J1.16 43,29.001 42.565,28.566 42.166,28.566 41.854,28.254 41.854,25.795 42.525,25.124 43.227,25.124 44.279,24.072 44.279,23.371 45.313,22.336 46.249,22.336 54.614,13.971 65.197,13.971 66.618,15.393 66.618,15.428 67.14,15.95 U1.24
NetB1_2: B1.2 C10.2 | length 5.2
  Bottom Layer w0.5: C10.2 28.55,35.85 28.65,35.95 28.65,36 31.265,38.615 B1.2
NetB1_3: B1.3 R10.1 R11.2 | length 10.8
  Bottom Layer w0.5: R10.1 28.616,37.952 30.549,39.885 B1.3 32.978,39.885 34.452,38.411 R11.2
NetB1_6: B1.6 D4.2 R9.1 | length 12.2
  Bottom Layer w0.5: D4.2 R9.1 34.952,42.455 37.522,39.885 B1.6
NetB1_7: B1.7 R12.2 | length 4.1
  Bottom Layer w0.5: B1.7 38.4,38.615 39.135,37.88 39.135,36.816 38.116,35.798 R12.2
NetB1_8: B1.8 R11.1 R13.2 | length 5.9
  Bottom Layer w0.5: R13.2 R11.1 36.048,36.798 36.595,37.345 B1.8
NetC3_2: C3.2 R2.1 S1.1 U1.3 | length 10.3
  Top Layer w0.254: S1.1 64.627,40.623 65.398,40.623 67.655,38.366 R2.1 67.6,38.195 C3.2 ; C3.2@67.6,36.7 69.357,34.943 69.357,34.073 U1.3
NetC4_2: C4.2 S1.2 | length 3.4
  Top Layer w0.254: C4.2 61.8,45.35 64,47.55 S1.2
NetC5_2: C5.2 S2.1 | length 3.5
  Top Layer w0.254: S2.1 54.5,39.6 55.8,38.3 C5.2
NetC6_2: C6.2 J7.SHELL R6.2 | length 23.7
  Top Layer w0.254: R6.2 24.095,11.9 C6.2 22.5,8.4 23.18,7.72 23.18,7.161 23.18,2.981 31.82,2.981 J7.SHELL@31.82,7.161
NetC11_1: C11.1 U2.6
NetC11_2: C11.2 L1.2 U2.2
NetC15_1: C15.1 L2.1 U3.2 | length 8.9
  Bottom Layer w0.254: L2.1 26,31 27.25,29.75 ; U3.2 27.25,29.75 ; C15.1 28.4,27.05 28.3,27.15 27.35,27.15 26.919,27.581 26.919,29.419 27.25,29.75
NetC15_2: C15.2 U3.6 | length 2
  Bottom Layer w0.254: C15.2 30.1,27.05 30.625,27.575 U3.6
NetC23_2: C23.2 C24.2 D10.1 J4.1 J6.1 R1.1 U5.7 | length 36.9
  Top Layer w0.5: R1.1 12.674,4.909 12.828,5.063 12.828,5.179 16.786,9.137 16.786,19.159 J6.1 16.754,21.699 16.754,37.191 J4.1
NetC24_1: C24.1 C25.1 D10.2 J4.2 J6.2 J8.2 U5.6 | length 36
  Top Layer w0.5: J8.2 19.294,4.524 19.294,17.921 J6.2 19.294,20.429 19.294,35.921 J4.2
NetCR1_1: CR1.1 J7.A6 J7.B6 | length 11.6
  Top Layer w0.254: CR1.1 26.55,14.276 26.943,13.884 26.943,11.344 27.25,11.037 J7.A6 27.275,7.71 27.275,7.081 27.479,6.877 28.021,6.877 28.225,7.081 28.225,7.71 J7.B6
NetCR1_3: CR1.3 J7.A7 J7.B7 | length 13.5
  Top Layer w0.254: v1(26.719,10.5) 26.719,10.488 26.75,10.457 J7.B7 ; J7.A7 27.75,10.035 27.781,10.066 27.781,11.091 27.443,11.429 27.443,14.071 28.45,15.078 CR1.3
  Layer 1 w0.254: v1(26.719,10.5) 27.359,10.5 v1(27.781,10.078)
NetD1_A: D1.A J7.A4-B9 J7.B4-A9 | length 9.4
  Top Layer w0.254: J7.A4-B9 25.265,7.571 25.265,7.091 25.893,6.463 29.107,6.463 29.735,7.091 29.735,7.571 J7.B4-A9 29.9,8.879 30.25,9.229 D1.A
NetD2_1: D2.1 R7.2 | length 2
  Top Layer w0.254: R7.2@73.771,9.5 75.6,9.5 D2.1
NetD3_1: D3.1 J1.01 TR1.9 | length 7.9
  Top Layer w0.254: J1.01 46.01,11.5 48.705,11.5 49.25,12.045 49.85,11.445 TR1.9
NetD4_1: D4.1 R8.1 | length 2.6
  Bottom Layer w0.5: R8.1 D4.1
NetD7_1: D7.1 R16.1
NetD8_1: D8.1 R17.1
NetD9_1: D9.1 R18.1
NetF1_1: F1.1 TR1.16 | length 26.8
  Top Layer w0.254: v1(35,13.25) 35,14.127 35.373,14.5 F1.1 ; v1(51.75,2.5) 51.759,2.509 52.732,2.509 TR1.16
  Layer 1 w0.254: v1(35,13.25) 35,8.499 38.913,4.586 41.164,4.586 43.25,2.5 v1(51.75,2.5)
NetF2_1: F2.1 TR1.15 | length 22.8
  Top Layer w0.254: F2.1 38.9,14.5 40.632,12.768 40.632,5.869 v1(42.125,4.375) ; v1(51.75,3.75) 51.759,3.759 52.712,3.759 TR1.15
  Layer 1 w0.254: v1@42.134,4.367 42.751,3.75 v1(51.75,3.75)
NetF3_1: F3.1 TR1.14 | length 19.4
  Top Layer w0.254: v1(35.75,8.5) F3.1 ; v1(51.75,5) 51.759,5.009 52.692,5.009 TR1.14
  Layer 1 w0.254: v1(35.75,8.5) 39.25,5 v1(51.75,5)
NetF4_1: F4.1 TR1.13 | length 21.1
  Top Layer w0.254: F4.1 38.5,6.544 43.481,1.563 47.519,1.563 49.849,3.893 49.849,3.896 52.318,6.365 TR1.13
NetF5_1: F5.1 TR1.12 | length 7.9
  Top Layer w0.254: F5.1 46.9,3.15 51.385,7.635 TR1.12@52.5,7.635
NetF6_1: F6.1 TR1.11 | length 7.3
  Top Layer w0.254: F6.1 46.9,5.65 50.155,8.905 TR1.11@52.5,8.905
NetF7_1: F7.1 TR1.10 | length 6.4
  Top Layer w0.254: F7.1 48.25,7.75 50.675,10.175 TR1.10@52.25,10.175
NetIC1_1: IC1.1 TR1.7 | length 5.5
  Top Layer w0.254: TR1.7 58.822,10.314 62.877,11.253 IC1.1
NetIC1_2: IC1.2 TR1.6 | length 5.5
  Top Layer w0.254: TR1.6 58.822,9.044 62.877,9.983 IC1.2
NetIC1_3: IC1.3 TR1.5 | length 5.5
  Top Layer w0.254: TR1.5 58.822,7.774 62.877,8.713 IC1.3
NetIC1_4: IC1.4 TR1.4 | length 5.5
  Top Layer w0.254: TR1.4 58.822,6.504 62.877,7.443 IC1.4
NetIC1_5: IC1.5 TR1.3 | length 5.5
  Top Layer w0.254: TR1.3 58.822,5.234 62.877,6.173 IC1.5
NetIC1_6: IC1.6 TR1.2 | length 5.5
  Top Layer w0.254: TR1.2 58.822,3.964 62.877,4.903 IC1.6
NetIC1_7: IC1.7 TR1.1 | length 5.5
  Top Layer w0.254: TR1.1 58.822,2.694 62.877,3.633 IC1.7
NetIC1_11: IC1.11 R3.1 U1.10 | length 33.1
  Top Layer w0.254: v1(60.75,32.5) 60.75,33.71 U1.10 ; v1@67.512,5 68.874,5 IC1.11
  Layer 2 w0.254: v1(60.75,32.5) 60.75,15.252 67.5,8.502 v1(67.5,5)
NetIC1_15: IC1.15 R7.1 | length 3.3
  Top Layer w0.254: IC1.15 71.344,10.181 71.632,9.893 71.675,9.893 71.952,9.616 R7.1
NetJ4_5: J4.5 J5.1 | length 21.2
  Layer 1 w0.254: J4.5 23.635,33.365 27.865,29.135 34.96,29.135
NetJ4_6: J4.6 J5.2 | length 21.7
  Layer 1 w0.254: J4.6 23.681,32.095 27.822,27.954 36.319,27.954 37.5,29.135
NetJ4_7: J4.7 J5.3 | length 21.2
  Layer 1 w0.254: J4.7 23.675,30.825 27.905,26.595 34.96,26.595
NetJ4_8: J4.8 J5.4 | length 21.7
  Layer 1 w0.254: J4.8 23.695,29.555 27.836,25.414 36.319,25.414 37.5,26.595
NetJ5_5: J5.5 J6.5 | length 23.1
  Layer 1 w0.254: J6.5 26.03,15.365 34.72,24.055 34.96,24.055
NetJ5_6: J5.6 J6.6 | length 23.6
  Layer 1 w0.254: J6.6 25.345,14.095 33.946,22.696 36.141,22.696 37.5,24.055
NetJ5_7: J5.7 J6.7 | length 23.1
  Layer 1 w0.254: J6.7 26.27,12.825 34.96,21.515
NetJ5_8: J5.8 J6.8 | length 23.6
  Layer 1 w0.254: J6.8 27.54,11.555 37.5,21.515
NetJ7_A5: J7.A5 R4.2 | length 4.3
  Top Layer w0.254: R4.2 25.948,10.066 26.25,9.764 J7.A5
NetJ7_B5: J7.B5 R5.2 | length 4.7
  Top Layer w0.254: R5.2@28.25,12.064 28.25,10.963 29.25,9.963 J7.B5
NetJ8_1: J8.1 R1.2 | length 3.1
  Top Layer w0.5: R1.2@12.374,3.25 J8.1@15.473,3.25
NetR14_1: R14.1 R15.2 U2.4
NetR19_1: R19.1 R20.2 U3.4
NetSJ1_1: SJ1.1 U5.8
OUT0: F1.2 J1.14 | length 12
  Top Layer w0.254: F1.2 35.75,18.089 35.914,18.253 v1(35.914,18.259)
  Layer 2 w0.254: v1(35.914,18.259) 40.373,22.717 40.373,23.643 J1.14
OUT1: F2.2 J1.12 | length 8.3
  Top Layer w0.254: F2.2 v1(38.5,18.25)
  Layer 2 w0.254: v1(38.5,18.25) 38.5,19.23 J1.12
OUT2: F3.2 J1.10 | length 12
  Top Layer w0.254: F3.2 v1(35.75,12.75)
  Layer 2 w0.254: v1(35.75,12.75) 35.75,13.94 J1.10
OUT3: F4.2 J1.08 | length 8.4
  Top Layer w0.254: F4.2 v1(38.5,12.75)
  Layer 2 w0.254: v1(38.5,12.75) 38.5,14.15 J1.08
OUT4: F5.2 J1.06 | length 16.2
  Top Layer w0.254: v1(43.5,3.219) 43.727,3.219 44.1,2.846 F5.2
  Layer 2 w0.254: J1.06 41,14.11 41,4.75 42.531,3.219 v1(43.5,3.219)
OUT5: F6.2 J1.04 | length 9.8
  Top Layer w0.254: v1(43.5,6.25) 44.1,5.65 F6.2
  Layer 2 w0.254: J1.04 41.75,12.32 41.75,8 v1(43.5,6.25)
OUT6: F7.2 J1.02 | length 3.7
  Top Layer w0.254: v1(43.5,8.75) 44.1,8.15 F7.2
  Layer 2 w0.254: J1.02 43,9.25 v1(43.5,8.75)
RCK: IC1.12 U1.12 | length 32.3
  Top Layer w0.254: v1(58.25,32.5) U1.12 ; v1(66.5,8) 67.987,6.513 68.832,6.513 IC1.12
  Layer 2 w0.254: v1(58.25,32.5) 58.25,16.25 v1(66.5,8)
RX: U1.26 U6.2
SI: IC1.14 U1.11 | length 30.4
  Top Layer w0.254: v1(59.5,32.5) 59.5,33.73 U1.11 ; v1(66.5,8.75) 68.815,8.75 IC1.14
  Layer 2 w0.254: v1(59.5,32.5) 59.5,15.749 v1(66.5,8.75) v1(66.5,8.75)
TX: U1.27 U6.3
USB_N: CR1.4 U1.13
USB_P: CR1.6 U1.14
pads on no net: IC1.9 J4. J4.4 J6. J6.4 J7.17 J7.18 J7.A8 J7.B8 L1.1 S1.3 S2.3 S2.4 U1.22 U2.5 U4.11 U5.5

## Polygon pours and split planes (outlines as drawn)
GND on Top Layer "NONET_L01_P000" (solid, shelved, pour order 0): 0,1 0,49 cw(c1,49) 1,50 79,50 cw(c79,49) 80,49 80,1 cw(c79,1) 79,0 1,0 cw(c1,1)
GND on Layer 1 "NONET_L02_P001" (solid, shelved, pour order 1): 0,1 0,49 cw(c1,49) 1,50 79,50 cw(c79,49) 80,49 80,1 cw(c79,1) 79,0 1,0 cw(c1,1)
GND on Layer 2 "NONET_L03_P002" (solid, shelved, pour order 2): 0,1 0,49 cw(c1,49) 1,50 79,50 cw(c79,49) 80,49 80,1 cw(c79,1) 79,0 1,0 cw(c1,1)
GND on Bottom Layer "NONET_L04_P003" (solid, shelved, pour order 3): 0,1 0,49 cw(c1,49) 1,50 79,50 cw(c79,49) 80,49 80,1 cw(c79,1) 79,0 1,0 cw(c1,1)

## Keep-outs
Keep-Out Layer:
  the board outline again, w2

## Silkscreen, mask and mechanical layers (free items; w line width, h text height)
BoardShape:
  the board outline again, w0.254

## Text inside footprints (layer, text, board x,y; h text height)
CR1: Top Overlay "*" at 27.323,17.16 h1.27 r90; Mechanical 13 "*" at 27.322,17.187 h1.27 r90
TR1: Top Overlay "*" at 57.427,3.334 h1.27 r180; Mechanical 13 "*" at 57.43,3.355 h1.27 r180
U2: Mechanical 13 "*" at 63.297,126.537 h1.27 r90; Bottom Overlay "*" at 63.285,126.525 h1.27 r90
U3: Mechanical 13 "*" at 28.437,29.572 h1.27 r180; Bottom Overlay "*" at 28.437,29.565 h1.27 r180
U4: Top Overlay "*" at 35.387,44.222 h1.27 r270; Mechanical 13 "*" at 35.374,44.234 h1.27 r270
U5: Top Overlay "*" at 119.457,48.336 h1.27; Mechanical 13 "*" at 120.82,47.156 h1.27